# Altium PCB EST_MainV20.PcbDoc (part 3 of 8)
Units mm, origin at the board's own origin, x right, y up, seen from the top; angles counter-clockwise.
Board outline 69.72 x 115.32 mm, 2 copper layers (Top Layer, Bottom Layer); 330 components, 239 nets, 1066 pads, 416 vias.
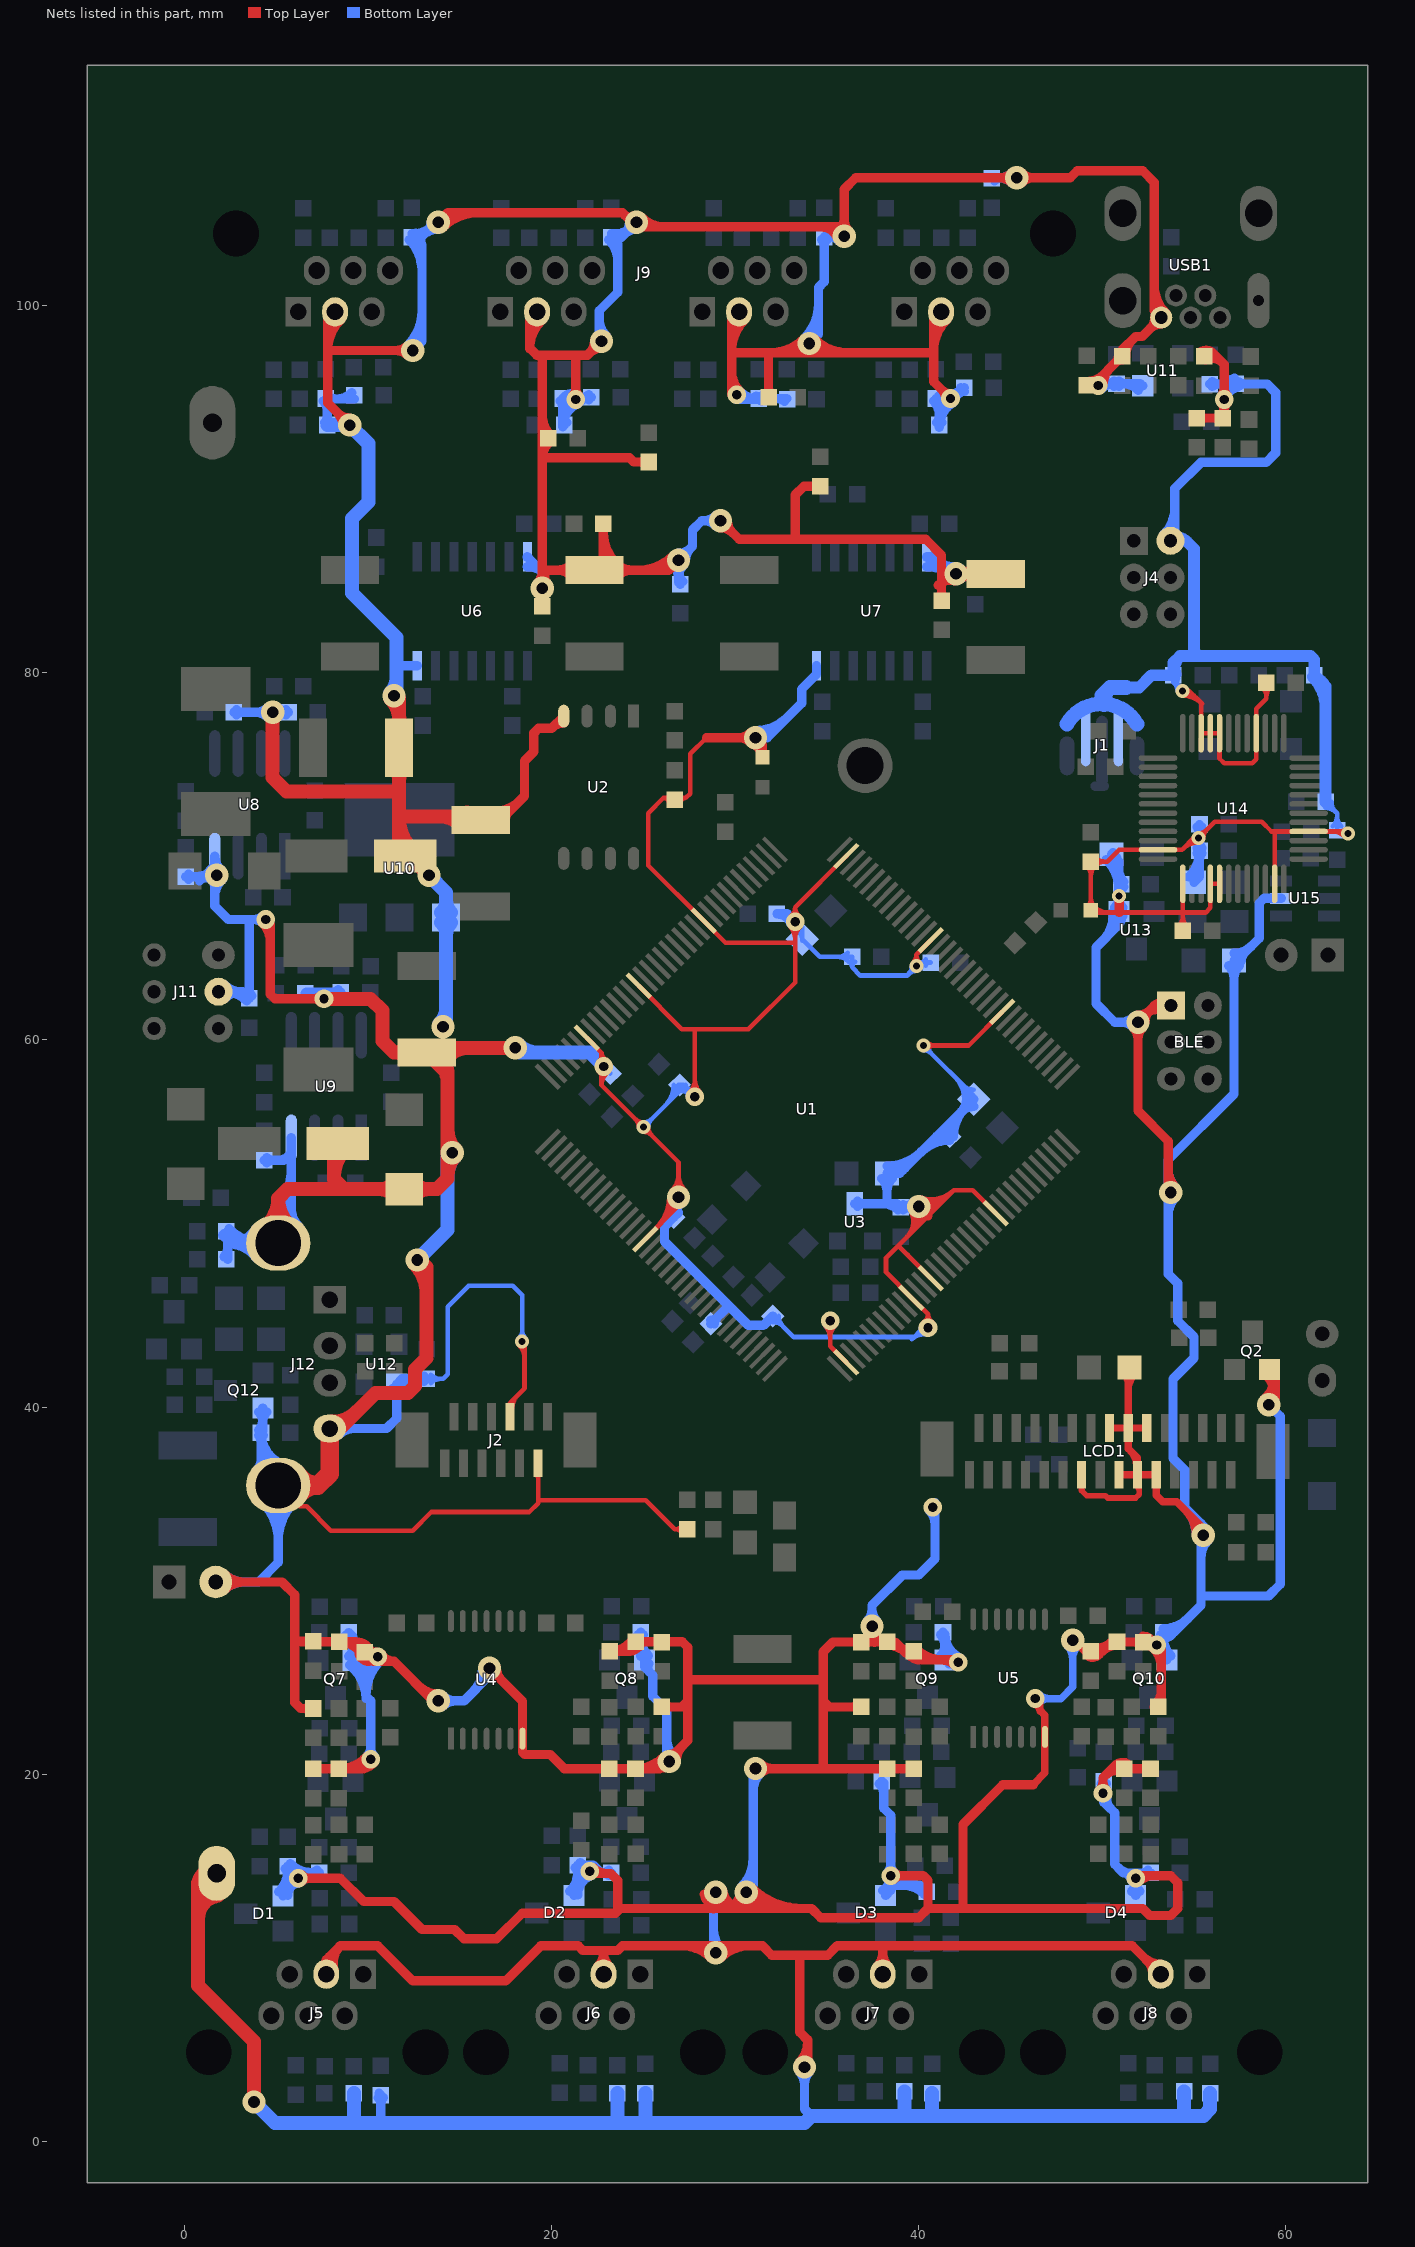
[diagram p3: the nets of this part, all layers, seen from the top]

## Via types
v1: diameter 0.762, hole 0.381, Top Layer to Bottom Layer, 258 vias
v2: diameter 1.27, hole 0.635, Top Layer to Bottom Layer, 91 vias
v3: diameter 1.016, hole 0.508, Top Layer to Bottom Layer, 66 vias
v4: diameter 1.524, hole 0.635, Top Layer to Bottom Layer, 1 vias

## Nets (pads, with @x,y where several pads share a name; then routed paths per layer and width w, separated by ;. In a path a pad name is that pad's centre, name@x,y a point inside that pad or via, vN(x,y) a via of type N, cw(c..) or ccw(c..) an arc to the next point about the centre after c; other vN are vias at no path point) (continued)
GND: BLE.1 C5.1 C6.1 C7.1 C8.1 C9.2 C10.1 C11.1 C12.1 C15.2 C16.2 C17.2 C18.2 C19.2 C20.2 C21.2 C22.2 C23.2 C24.2 C25.2 C26.2 C27.2 C28.2 C29.2 C30.2 C31.1 C32.1 C33.1 C34.1 C35.1 C36.1 C37.1 C38.1 C39.2 C40.1 C41.1 C42.1 C43.1 C44.1 C45.1 C46.1 C47.2 C48.1 C49.1 C50.1 C51.1 C52.1 C53.1 C54.1 C57.2 C58.2 C61.1 C62.1 C63.2 C64.1 C65.2 C66.1 C67.1 C68.2 C69.1 C70.2 C71.1 C72.1 C73.2 C74.1 C75.1 C76.1 C77.1 C78.1 C79.1 C80.1 C81.1 C83.2 C84.2 C85.2 D1.1 D2.1 D3.1 D4.1 D6.1 D12.2 D13.2 E1.2 E2.2 E3.2 E4.2 E5.2 E6.2 E7.2 J1.2 J2.2 J2.5 J4.2 J5.3 J6.3 J7.3 J8.3 J9.3 J9.9 J9.15 J9.21 J10.2 J11.2 J12.4 J12.5 J12.6 LCD1.10 LCD1.11 LCD1.12 LCD1.13 LCD1.14 LCD1.15 LCD1.18 pad.1 Q2.1 Q7.1 Q8.1 Q9.1 Q10.1 Q12.1 R9.1 R10.1 R11.1 R41.1 R42.1 R43.1 R44.1 R45.1 R46.1 R47.1 R48.1 R57.2 R58.2 R59.2 R60.2 R85.2 R87.2 R89.2 R91.2 R93.2 R94.2 R95.2 R96.2 R102.1 R104.1 R120.1 R122.1 R139.1 R140.1 R141.2 R142.2 R143.2 R149.1 R151.1 R158.1 R159.1 R160.1 R167.2 R171.1 R172.1 R173.1 R174.1 U1.16 U1.38 U1.48 U1.51 U1.61 U1.83 U1.94 U1.107 U1.120 U1.130 U1.138 U2.4 U3.2 U4.7 U5.7 U6.7 U6.14 U7.7 U7.14 U8.4 U9.4 U10.1 U11.1 U12.1 U13.2 U14.4 U14.16 U14.20 U14.21 U14.22 U14.35 U14.37 U14.40 U14.41 U14.47 U15.2 USB1.5 | length 1769.5
  Top Layer w0.254: J12.6@5.13,35.735 6.272,34.593 6.682,34.593 8.001,33.274 12.446,33.274 13.462,34.29 18.796,34.29 19.279,34.773 19.279,34.925 ; J2.5@17.676,40.066 ccw(c17.537,40.234) 17.755,40.234 ; J2.5@17.755,39.472 17.755,40.234 ; J2.5@17.833,40.066 cw(c17.972,40.234) 17.755,40.234 ; J2.5@17.878,39.972 cw(c18.807,39.972) 18.15,40.629 ; v1@18.235,43.381 cw(c17.495,42.641) 18.542,42.641 ; v1(18.415,43.561) 18.542,43.434 18.542,41.021 17.755,40.234 ; J2.2@19.192,36.345 cw(c18.982,36.135) 19.279,36.135 cw(c19.576,36.135) J2.2@19.366,36.345 ; J2.2@19.279,36.424 19.279,34.925 ; U1.138@21.927,60.109 22.733,59.302 ; v3@22.591,58.278 cw(c22.247,57.934) 22.733,57.934 ; v3@22.591,58.816 ccw(c22.247,59.16) 22.733,59.16 ; 22.733,57.523 cw(c23.638,57.523) v3@23.09,58.244 ; 22.733,58.035 cw(c23.249,58.035) v3@22.937,58.446 ; v3@23.004,58.9 cw(c23.167,59.302) 22.733,59.302 ; U1.130@24.755,62.937 27.113,60.579 27.813,60.579 ; v1@24.765,55.245 ccw(c24.152,55.245) 24.585,55.679 ccw(c25.019,56.112) v1@25.019,55.499 ; v1@25.019,54.991 cw(c25.019,54.378) 25.453,54.811 cw(c25.886,55.245) v1@25.273,55.245 ; U1.16@25.109,49.148 26.924,50.964 v2(26.924,51.435) ; U1.16@25.724,49.764 ccw(c24.052,51.435) v2@26.416,51.435 ; 26.157,50.197 ccw(c24.919,51.435) v2@26.67,51.435 ; 26.182,73.174 ccw(c26.182,73.607) C11.1@26.488,73.301 ; C11.1@26.414,72.961 ccw(c26.107,72.848) 26.107,73.174 ; v2@26.565,51.794 ccw(c25.698,52.661) 26.924,52.661 ccw(c28.15,52.661) v2@27.283,51.794 ; 26.591,50.631 ccw(c25.787,51.435) v2(26.924,51.435) ; C11.1@26.945,73.301 ccw(c27.251,73.607) 27.251,73.174 ; C11.1@27.02,72.96 cw(c27.327,72.846) 27.327,73.174 ; R10.1@27.158,33.144 ccw(c26.721,32.783) 26.721,33.35 ; R10.1@27.158,33.556 cw(c26.721,33.918) 26.721,33.35 ; R10.1@27.407,33.35 26.721,33.35 ; v3@27.544,57.165 ccw(c26.893,57.816) 27.813,57.816 ccw(c28.733,57.816) v3@28.082,57.165 ; v3(27.813,56.896) 27.813,60.579 ; 28.448,76.454 27.559,75.565 27.559,73.406 27.327,73.174 ; v3@33.005,66.152 cw(c32.354,65.501) 33.274,65.501 cw(c34.194,65.501) v3@33.543,66.152 ; v3@33.036,66.719 ccw(c32.641,67.213) 33.274,67.213 ; v3@33.512,66.719 cw(c33.907,67.213) 33.274,67.213 ; v3@34.91,44.435 cw(c34.259,43.784) 35.179,43.784 cw(c36.099,43.784) v3@35.448,44.435 ; 35.179,43.815 35.179,43.321 ; v3(35.179,44.704) 35.179,43.321 ; U1.38@36.069,42.431 35.179,43.321 ; U1.107@36.069,70.008 33.274,67.213 ; 39.369,49.275 ccw(c38.54,50.104) v2@39.562,50.678 ; 39.37,48.322 39.528,48.164 ; 39.606,49.512 ccw(c38.843,50.274) v2@39.784,50.803 ; v1@39.698,64.188 ccw(c39.265,64.621) 39.878,64.621 ccw(c40.491,64.621) v1@40.058,64.188 ; 39.761,50.205 ccw(c39.98,50.853) 40.463,50.369 ; 39.843,49.749 ccw(c39.147,50.445) v2(40.005,50.927) ccw(c40.418,52.15) 41.331,51.237 ; v2@39.842,50.446 ccw(c40.126,51.285) 40.753,50.659 ; v1(39.878,64.008) 39.878,64.625 U1.94@40.665,65.412 ; v2@39.924,50.686 ccw(c40.272,51.718) 41.042,50.948 ; 40.08,49.986 ccw(c39.45,50.615) v2@40.226,51.051 ; v2@40.086,51.168 ccw(c40.564,52.583) 41.621,51.527 ; v2@40.168,51.408 ccw(c40.71,53.015) 41.91,51.816 ; v1(40.259,59.69) 42.721,59.69 U1.83@44.554,61.523 ; v3@40.294,44.634 ccw(c39.995,45.058) 40.513,45.058 ; 40.317,50.223 ccw(c39.754,50.786) v2@40.448,51.176 ; v1@40.439,59.51 cw(c40.872,59.077) 40.872,59.69 cw(c40.872,60.303) v1@40.439,59.87 ; v3@40.513,44.577 40.513,45.058 ; 40.554,50.46 ccw(c40.057,50.956) 40.669,51.3 ; U1.51@40.665,47.027 39.528,48.164 ; v3@40.732,44.634 cw(c41.031,45.058) 40.513,45.058 ; 42.291,51.816 42.947,51.816 ; U1.61@44.2,50.563 42.947,51.816 ; R167.2@49.149,69.469 cw(c48.597,68.918) 49.377,68.918 cw(c50.157,68.918) 49.606,69.469 cw(c50.157,68.918) 50.157,69.698 cw(c50.157,70.478) R167.2@49.606,69.926 ; D13.2@49.192,67.242 ccw(c48.747,67.688) 49.377,67.688 ; D13.2@49.377,67.057 R167.2@49.377,69.698 50.267,69.698 50.912,70.343 U14.35@53.033,70.343 54.341,70.343 54.991,70.993 v1(55.245,70.993) ; 49.377,67.707 ccw(c50.034,67.707) 49.57,67.242 ccw(c50.326,67.998) 50.326,66.929 ; D13.2@49.381,67.054 49.506,66.929 54.383,66.929 ; C81.1@54.15,66.171 ccw(c53.588,66.733) 54.383,66.733 ; v1@54.356,78.74 cw(c54.356,77.207) 55.44,78.291 ; 54.378,70.38 cw(c55.245,69.513) v1@55.245,70.739 ; C81.1@54.378,65.942 54.383,65.947 54.383,66.929 ; 54.383,66.712 ccw(c55.148,66.712) C81.1@54.607,66.171 ; U14.37@54.383,68.493 54.383,66.929 ; 54.811,70.813 cw(c55.245,70.38) v1(55.245,70.993) ; 55.006,78.725 ccw(c54.356,78.074) v1(54.356,78.994) 54.737,78.994 55.383,78.348 U14.22@55.383,76.693 U14.21@55.883,76.693 U14.20@56.383,76.693 56.383,75.316 56.642,75.057 58.166,75.057 58.383,75.274 U14.16@58.383,76.693 58.383,78.023 58.931,78.571 C70.2@58.931,79.447 ; v1@55.245,71.247 ccw(c55.245,71.86) 55.679,71.427 ccw(c56.112,70.993) v1@55.499,70.993 ; U14.41@56.383,68.493 U14.40@55.883,68.493 55.883,67.186 55.626,66.929 54.383,66.929 ; C70.2@58.703,79.219 cw(c58.151,78.667) 58.931,78.667 cw(c59.711,78.667) C70.2@59.16,79.219 ; U14.47@59.383,68.493 59.383,70.739 ; 59.383,70.94 59.383,70.739 ; 62.527,71.343 cw(c62.527,70.401) v1@63.193,71.067 ; 62.993,71.343 ccw(c62.993,71.627) v1@63.193,71.427 ; v1(63.373,71.247) 63.277,71.343 U14.4@61.233,71.343 59.33,71.343 ; 19.279,34.925 25.146,34.925 26.721,33.35 ; 22.733,59.302 22.733,57.531 v1(25.019,55.245) 26.924,53.34 v2(26.924,51.435) ; 26.107,73.174 27.327,73.174 ; 26.107,73.174 25.273,72.34 25.273,69.49 U1.120@28.29,66.472 29.485,65.278 33.274,65.278 ; 27.813,60.579 30.734,60.579 33.274,63.119 33.274,65.278 ; 33.274,65.278 v3(33.274,66.421) 33.274,67.213 ; 38.861,48.767 38.925,48.767 39.528,48.164 ; 38.861,48.767 40.513,50.419 41.91,51.816 ; 38.861,48.767 38.227,48.133 38.227,47.344 U1.48@39.604,45.966 40.513,45.058 ; 41.91,51.816 42.947,51.816 ; v1(55.245,70.993) 56.134,71.882 58.674,71.882 59.213,71.343 59.33,71.343 ; 59.33,71.343 59.383,71.29 59.383,70.739
  Top Layer w0.305: LCD1.18@48.87,36.322 48.87,35.458 49.149,35.179 50.165,35.179 50.292,35.052 51.816,35.052 52.019,35.255 LCD1.12@52.019,36.322 ; LCD1.18@48.946,35.761 ccw(c49.179,35.573) 48.967,35.361 ; LCD1.12@51.849,35.753 cw(c51.437,35.341) 52.019,35.341
  Top Layer w0.406: 46.232,19.435 46.877,20.08 U5.7@46.877,22.047 46.877,23.227 46.609,23.495 v3@46.609,24.13 ; v3@46.294,23.831 cw(c46.216,23.446) 46.609,23.446 ; v3@46.617,23.974 ccw(c47.009,23.74) 46.686,23.418 ; v2(48.387,27.305) 48.444,27.305 C31.1@49.05,26.698 ; v2@48.609,27.139 ccw(c49.146,27.676) C31.1@49.324,26.938 ; LCD1.15@50.394,38.862 LCD1.13@51.41,38.862 ; LCD1.14@50.902,36.322 LCD1.12@51.918,36.322 ; C5.1@51.168,41.85 cw(c50.586,41.268) 51.41,41.268 ; 51.41,40.906 cw(c52.744,40.906) C5.1@51.8,41.85 ; LCD1.13@51.484,38.937 LCD1.13@51.41,38.862 ; C5.1@51.484,42.166 51.41,42.091 LCD1.13@51.41,38.862 ; 51.545,37.609 cw(c50.757,36.822) LCD1.12@51.871,36.822 ; LCD1.11@52.426,38.862 LCD1.13@51.41,38.862 ; 54.492,34.408 cw(c53.105,33.02) v2@55.067,33.02 ; 55.186,33.714 cw(c54.492,33.02) v2@55.474,33.02 ; v2(55.499,33.02) 55.499,33.401 54.051,34.849 53.289,34.849 52.934,35.204 LCD1.10@52.934,36.322 LCD1.12@51.918,36.322 ; C31.1@49.05,26.698 C31.1@49.382,26.698 C31.1@49.05,26.698 ; LCD1.13@51.41,38.862 51.41,37.744 51.918,37.236 LCD1.12@51.918,36.322
  Top Layer w0.508: J10.2@1.727,30.48 5.334,30.48 6.025,29.789 6.025,27.178 ; J10.2@2.176,30.031 cw(c3.26,28.947) 3.26,30.48 cw(c3.26,32.013) J10.2@2.176,30.929 ; v3@4.265,66.368 cw(c3.219,65.322) 4.699,65.322 ; v3(4.445,66.548) 4.699,66.294 4.699,62.484 4.953,62.23 v3(7.62,62.23) ; v3(6.223,14.351) 8.509,14.351 9.779,13.081 11.43,13.081 12.954,11.557 14.732,11.557 15.24,11.049 17.018,11.049 18.415,12.446 23.495,12.446 23.749,12.7 ; 6.397,27.225 C36.1@8.442,27.225 ; v3@6.403,14.171 cw(c6.836,13.738) 6.836,14.351 cw(c6.836,14.964) v3@6.403,14.531 ; 6.515,27.225 ccw(c6.515,27.774) 6.903,27.385 cw(c6.568,27.72) 6.568,27.247 cw(c6.568,26.774) R94.2@6.903,27.108 ; R87.2@6.903,23.451 ccw(c6.568,23.116) 6.568,23.589 ccw(c6.568,24.062) R87.2@6.903,23.728 ; C24.2@7.037,20.31 C23.2@8.434,20.31 ; R87.2@7.041,23.589 6.355,23.589 6.025,23.92 6.025,27.178 ; R94.2@7.041,27.247 6.094,27.247 6.025,27.178 ; C24.2@7.175,20.171 cw(c7.51,19.837) 7.51,20.31 cw(c7.51,20.783) C24.2@7.175,20.448 ; R94.2@7.18,27.385 ccw(c7.568,27.774) 7.568,27.225 ; v3@7.44,62.05 ccw(c7.007,61.617) 7.007,62.23 ccw(c7.007,62.843) v3@7.44,62.41 ; J5.3@7.687,9.206 cw(c8.517,9.451) 7.905,10.064 ; J5.3@7.746,9.124 7.746,9.905 8.509,10.668 ; 7.819,97.496 cw(c10.25,97.496) J9.3@8.536,99.219 ; 7.819,98.718 cw(c9.034,98.718) J9.3@8.177,99.58 ; J9.3@7.819,99.136 7.819,97.536 ; J5.3@8.174,9.35 cw(c9.45,9.727) 8.509,10.668 ; C23.2@8.295,20.171 ccw(c7.96,19.837) 7.96,20.31 ccw(c7.96,20.783) C23.2@8.295,20.448 ; C36.1@8.303,27.086 ccw(c7.969,26.752) 7.969,27.225 ccw(c7.969,27.698) C36.1@8.303,27.363 ; C23.2@8.572,20.171 cw(c8.907,19.837) 8.907,20.31 cw(c8.907,20.783) C23.2@8.572,20.448 ; C36.1@8.581,27.086 cw(c8.915,26.752) 8.915,27.225 cw(c8.915,27.698) C36.1@8.581,27.363 ; v2@8.636,93.472 ccw(c7.716,93.472) 8.367,94.122 ccw(c9.017,94.773) v2@9.017,93.853 ; v2(9.017,93.472) 7.819,94.67 7.819,97.536 ; 9.351,27.225 cw(c9.351,26.341) C32.1@10.104,26.804 ; C32.1@9.493,26.986 ccw(c10.304,27.796) v3@10.498,26.666 ; C32.1@9.545,26.536 ccw(c10.075,26.725) 10.075,26.162 ; 9.569,20.31 ccw(c9.569,21.356) v3@10.349,20.659 ; C32.1@9.643,26.64 ccw(c9.169,26.64) 9.504,26.975 ccw(c9.839,27.31) C32.1@9.839,26.836 ; C32.1@9.672,26.538 ccw(c8.442,25.781) C36.1@8.442,27.225 ; C32.1@9.839,26.444 cw(c9.839,25.971) 10.173,26.306 cw(c10.508,26.64) C32.1@10.035,26.64 ; v3@9.971,20.997 cw(c8.434,22.371) C23.2@8.434,20.31 ; C32.1@10.023,26.706 ccw(c10.795,26.981) v3@10.795,26.162 ; v3(10.16,20.828) 10.287,20.828 9.769,20.31 C23.2@8.434,20.31 ; v3@10.76,26.545 ccw(c11.43,26.94) 11.43,26.162 ; v2@12.177,97.267 ccw(c11.526,96.616) 11.526,97.536 ccw(c11.526,98.456) v2@12.177,97.805 ; v2(12.446,97.536) 7.819,97.536 ; 12.759,24.833 ccw(c13.843,25.917) v2@13.843,24.384 ; 12.827,8.763 13.589,8.763 ; v2(13.843,24.003) 13.589,24.003 11.43,26.162 ; v2(13.843,104.521) 14.351,105.029 16.51,105.029 ; 14.478,105.029 16.51,105.029 ; E7.2@15.646,72.161 17.424,72.161 18.542,73.279 18.542,75.184 19.05,75.692 19.05,76.708 19.304,76.962 20.015,76.962 U2.4@20.676,77.622 ; v2@16.637,25.4 cw(c16.637,24.48) 17.287,25.131 cw(c17.938,25.781) v2@17.018,25.781 ; v2(16.637,25.781) 18.429,23.989 U4.7@18.429,21.946 18.429,21.209 18.556,21.082 19.939,21.082 20.704,20.317 C26.2@23.161,20.317 C25.2@24.583,20.317 ; E7.2@16.98,72.466 ccw(c16.98,74.275) 18.259,72.996 ; E7.2@17.488,71.958 cw(c18.132,71.958) E7.2@17.676,72.413 ; 18.819,97.62 cw(c20.96,97.62) J9.9@19.521,99.205 ; 18.819,98.768 cw(c19.918,98.768) J9.9@19.179,99.582 ; J9.9@18.819,99.136 18.819,97.663 19.2,97.282 21.971,97.282 v2@22.606,97.917 ; v2@19.234,84.851 ccw(c18.583,85.502) 19.503,85.502 ccw(c20.423,85.502) v2@19.773,84.851 ; C39.2@19.365,83.752 ccw(c19.03,84.087) 19.503,84.087 ccw(c19.976,84.087) C39.2@19.642,83.752 ; C39.2@19.503,84.02 v2(19.503,84.582) 19.503,85.289 ; 19.503,91.643 cw(c20.75,91.643) R172.1@19.961,92.609 ; 19.503,94.04 ccw(c21.117,94.04) R172.1@19.976,92.899 ; 19.503,97.227 19.503,91.694 ; v2@19.779,84.845 cw(c20.154,85.205) 19.787,85.573 ; 20.042,76.989 cw(c20.676,76.356) U2.4@20.676,77.251 ; v3@21.156,95.049 ccw(c20.723,95.482) 21.336,95.482 ccw(c21.949,95.482) v3@21.516,95.049 ; E1.2@21.167,85.213 ccw(c20.3,84.346) 20.3,85.573 ccw(c20.3,86.799) E1.2@21.167,85.932 ; v3(21.336,94.869) 21.336,97.155 ; v3@22.225,14.605 23.241,14.605 23.622,14.224 23.622,12.7 23.749,12.7 ; v3@22.278,14.912 ccw(c23.018,15.652) 23.018,14.605 ; v2@22.352,98.044 cw(c21.432,98.044) 22.083,97.394 cw(c22.733,96.743) v2@22.733,97.663 ; J6.3@22.531,9.539 ccw(c21.769,10.3) 22.846,10.3 ccw(c23.923,10.3) J6.3@23.161,9.539 ; R171.1@22.696,87.949 cw(c22.361,87.614) 22.835,87.614 cw(c23.308,87.614) R171.1@22.973,87.949 ; E1.2@22.835,86.055 R171.1@22.835,88.088 ; 22.835,86.4 ccw(c24.005,86.4) E1.2@23.178,85.573 ; 22.835,87.627 ccw(c25.232,87.627) 23.537,85.932 ccw(c24.404,86.799) 24.404,85.573 ccw(c24.404,84.346) E1.2@23.537,85.213 ; J6.3@22.846,9.124 22.846,10.414 ; C26.2@23.022,20.178 ccw(c22.688,19.844) 22.688,20.317 ccw(c22.688,20.79) C26.2@23.022,20.455 ; C26.2@23.299,20.178 cw(c23.634,19.844) 23.634,20.317 cw(c23.634,20.79) C26.2@23.299,20.455 ; C33.1@23.307,26.56 cw(c23.642,26.225) 23.642,26.698 cw(c23.642,27.172) C33.1@23.307,26.837 ; 23.368,105.029 22.606,105.029 ; 24.003,104.902 ccw(c24.257,105.156) v2@24.442,104.848 ; 24.161,26.698 ccw(c24.161,27.536) R95.2@24.841,27.046 ; R95.2@24.392,27.229 cw(c23.918,27.229) 24.253,26.894 cw(c24.588,26.559) R95.2@24.588,27.033 ; R95.2@24.429,27.343 cw(c23.169,28.251) C33.1@23.169,26.698 24.057,26.698 R95.2@24.588,27.229 27.127,27.229 27.432,26.924 27.432,25.146 ; C25.2@24.445,20.178 ccw(c24.11,19.844) 24.11,20.317 ccw(c24.11,20.79) C25.2@24.445,20.455 ; v2@24.511,104.267 v2@24.638,104.267 ; 24.716,85.573 ccw(c24.716,88.314) v2@26.655,86.375 ; C25.2@24.722,20.178 cw(c25.056,19.844) 25.056,20.317 cw(c25.056,20.79) C25.2@24.722,20.455 ; R95.2@24.726,27.09 cw(c25.061,26.755) 25.061,27.229 cw(c25.061,27.702) R95.2@24.726,27.367 ; v2@24.907,104.79 ccw(c26.171,106.054) 26.171,104.267 ; C49.1@25.156,91.324 ccw(c24.821,90.989) 24.821,91.462 ccw(c24.821,91.936) C49.1@25.156,91.601 ; C49.1@25.294,91.462 24.489,91.462 24.257,91.694 19.503,91.694 ; 25.487,27.229 cw(c25.487,26.68) C37.1@25.875,27.068 ; 25.8,20.317 ccw(c25.8,21.31) v2@26.506,20.612 ; 25.943,85.573 ccw(c25.943,87.087) v2@27.014,86.016 ; R89.2@26.01,23.673 27.102,23.673 27.432,24.003 ; v2@26.145,20.969 cw(c24.583,22.513) C25.2@24.583,20.317 ; R89.2@26.149,23.534 cw(c26.483,23.199) 26.483,23.673 cw(c26.483,24.146) R89.2@26.149,23.811 ; C37.1@26.152,27.068 cw(c26.54,26.68) 26.54,27.229 ; v2@26.416,21.082 ccw(c26.416,21.695) 26.85,21.262 ; v2@26.797,20.701 cw(c28.023,20.701) 27.156,21.568 ; v2(26.924,86.106) 26.391,85.573 E1.2@22.352,85.573 19.787,85.573 ; 27.116,10.668 cw(c27.116,8.447) v2@28.687,10.018 ; 28.331,13.475 ccw(c29.261,13.645) 29.261,12.7 ; 28.343,10.668 cw(c28.343,9.674) v2@29.046,10.377 ; 28.448,76.454 v2(31.115,76.454) 31.498,76.071 D12.2@31.498,75.391 ; 28.829,12.691 cw(c29.496,12.691) v2@29.152,13.262 ; v2@28.829,13.589 28.829,12.7 ; v2@28.831,13.566 ccw(c29.87,13.757) 29.87,12.7 ; v2@28.866,10.377 cw(c29.569,9.674) 29.569,10.668 ; v2@29.21,87.884 cw(c29.21,86.964) 29.86,87.615 cw(c30.511,88.265) v2@29.591,88.265 ; v2(29.21,88.265) 30.226,87.249 33.274,87.249 ; v2@29.225,10.018 cw(c30.796,8.447) 30.796,10.668 ; v2@29.331,13.658 ccw(c30.48,13.868) 30.48,12.7 ; 29.819,96.412 ccw(c31.388,96.412) v3@30.279,95.303 ; 29.819,97.488 cw(c32.268,97.488) J9.15@30.536,99.22 ; 29.819,98.715 cw(c31.042,98.715) J9.15@30.177,99.58 ; J9.15@29.819,99.136 29.819,97.409 ; v3@29.972,94.996 29.819,95.149 29.819,97.409 ; 30.158,13.14 ccw(c31.22,14.202) 31.22,12.7 ; v2@30.378,13.284 cw(c30.036,12.827) 30.607,12.827 ; v2@30.517,13.499 ccw(c32.447,15.429) 32.447,12.7 ; v2(30.607,13.589) 30.607,12.827 ; v2@30.836,13.284 ccw(c31.178,12.827) 30.607,12.827 ; v2@30.846,76.185 ccw(c30.195,75.534) 30.195,76.454 ccw(c30.195,77.374) v2@30.846,76.723 ; v2@30.876,13.858 ccw(c33.673,16.655) 33.673,12.7 ; v2@30.973,76.1 cw(c30.662,75.324) D12.2@31.498,75.324 ; v2(31.115,20.32) 31.118,20.317 34.798,20.317 ; v2@31.384,20.051 cw(c32.027,19.408) 32.027,20.317 ; v2@31.384,20.589 ccw(c32.042,21.247) 32.042,20.317 ; R173.1@31.688,95.134 ccw(c31.353,95.469) 31.826,95.469 ccw(c32.299,95.469) R173.1@31.965,95.134 ; R173.1@31.826,94.996 31.826,96.393 ; 31.826,95.707 31.826,96.393 ; 31.826,97.358 31.826,96.393 ; 31.89,97.409 ccw(c31.89,100.063) v2@33.767,98.186 ; 33.116,97.409 ccw(c33.116,98.837) v2@34.126,97.827 ; v2@33.513,4.333 ccw(c32.449,5.397) 33.953,5.397 ; v2@33.946,97.827 ccw(c34.956,98.837) 34.956,97.409 ; v2@33.953,4.064 33.953,5.544 33.528,5.969 33.528,10.16 ; v2(34.036,97.917) 33.528,97.409 ; v2@34.305,98.186 ccw(c36.182,100.063) 36.182,97.409 ; R174.1@34.507,90.006 ccw(c34.173,89.671) 34.173,90.145 ccw(c34.173,90.618) R174.1@34.507,90.283 ; R174.1@34.646,90.145 33.757,90.145 33.274,89.662 33.274,87.249 ; 35.306,104.267 34.671,104.267 ; v2@35.672,104.028 ccw(c35.021,104.679) 35.941,104.679 ccw(c36.861,104.679) v2@36.21,104.028 ; v2(35.941,103.759) 35.941,104.394 ; R91.2@36.743,23.534 ccw(c36.408,23.199) 36.408,23.673 ccw(c36.408,24.146) R91.2@36.743,23.811 ; C38.1@36.746,27.068 ccw(c36.412,26.733) 36.412,27.206 ccw(c36.412,27.68) C38.1@36.746,27.345 ; R91.2@36.881,23.673 35.128,23.673 34.798,24.003 ; C38.1@37.023,27.068 cw(c37.358,26.733) 37.358,27.206 cw(c37.358,27.68) C38.1@37.023,27.345 ; v2@37.278,27.735 cw(c36.974,27.197) 37.592,27.197 ; v2@37.592,28.194 37.592,27.206 ; J7.3@37.731,9.539 ccw(c36.969,10.3) 38.046,10.3 ccw(c39.123,10.3) J7.3@38.361,9.539 ; 37.777,27.206 ccw(c37.777,27.755) R96.2@38.165,27.367 ; J7.3@38.046,9.124 38.046,10.595 ; C28.2@38.161,20.178 ccw(c37.826,19.844) 37.826,20.317 ccw(c37.826,20.79) C28.2@38.161,20.455 ; R96.2@38.304,27.033 cw(c38.304,25.64) C34.1@39.288,26.625 ; C28.2@38.438,20.178 cw(c38.772,19.844) 38.772,20.317 cw(c38.772,20.79) C28.2@38.438,20.455 ; v3@38.661,14.298 cw(c39.094,13.865) 39.094,14.478 cw(c39.094,15.091) v3@38.661,14.658 ; v3@38.735,14.478 40.259,14.478 40.513,14.224 40.513,12.7 ; 38.964,26.949 ccw(c39.349,27.334) C34.1@39.629,26.867 ; C34.1@39.509,26.478 ccw(c40.087,27.056) 40.087,26.238 ; C27.2@39.583,20.178 ccw(c39.248,19.844) 39.248,20.317 ccw(c39.248,20.79) C27.2@39.583,20.455 ; C34.1@39.591,26.56 ccw(c39.256,26.225) 39.256,26.698 ccw(c39.256,27.172) C34.1@39.591,26.837 ; C27.2@39.722,20.317 C28.2@38.299,20.317 34.798,20.317 ; C34.1@39.73,26.502 cw(c39.73,26.029) 40.064,26.364 cw(c40.399,26.698) C34.1@39.926,26.698 ; C34.1@39.868,26.837 ccw(c41.314,28.283) 41.314,26.238 ; v2(40.005,50.927) 40.513,50.419 ; 40.819,97.496 cw(c43.25,97.496) J9.21@41.536,99.219 ; 40.819,98.718 cw(c42.034,98.718) J9.21@41.177,99.58 ; 41.068,84.756 cw(c41.722,84.101) v2@41.945,85 ; C47.2@41.107,84.057 ccw(c40.772,84.392) 41.246,84.392 ccw(c41.719,84.392) C47.2@41.384,84.057 ; J9.21@41.221,99.636 40.819,99.234 40.819,97.536 ; 41.244,26.238 cw(c41.244,25.191) v3@41.984,25.932 ; C47.2@41.246,83.918 41.246,84.934 ; v3@41.478,94.92 ccw(c40.865,94.92) 41.299,95.353 ccw(c41.732,95.787) v3@41.732,95.174 ; v3(41.732,94.92) 40.819,95.833 40.819,97.536 ; v3@42.291,26.238 40.19,26.238 39.885,26.543 C34.1@39.73,26.698 39.215,26.698 38.707,27.206 37.592,27.206 ; v2@42.306,85.1 cw(c42.957,84.45) 42.957,85.369 cw(c42.957,86.289) v2@42.306,85.639 ; E2.2@43.011,85.01 ccw(c42.144,84.143) 42.144,85.369 ccw(c42.144,86.596) E2.2@43.011,85.729 ; E2.2@44.196,85.369 v2(42.037,85.369) 41.681,85.369 41.246,84.934 ; v2@45.07,106.665 ccw(c44.419,106.014) 44.419,106.934 ccw(c44.419,107.854) v2@45.07,107.203 ; v2@45.608,106.665 cw(c46.259,106.014) 46.259,106.934 cw(c46.259,107.854) v2@45.608,107.203 ; 46.232,19.435 44.581,19.435 42.418,17.272 42.418,12.7 ; C67.1@49.145,95.843 ccw(c49.145,97.158) 50.075,96.228 ; C67.1@49.208,95.647 ccw(c49.208,96.207) v3@49.604,95.811 ; C31.1@49.316,26.393 ccw(c49.437,26.952) 49.841,26.548 ; C31.1@49.382,26.698 49.991,26.698 R93.2@50.499,27.206 ; C31.1@49.423,26.89 ccw(c49.671,28.034) R93.2@50.499,27.206 ; C31.1@49.52,26.56 cw(c49.855,26.225) 49.855,26.698 cw(c49.855,27.172) C31.1@49.52,26.837 ; v3@49.602,95.454 ccw(c49.145,95.009) C67.1@49.145,95.647 49.494,95.647 C65.2@51.075,97.228 51.075,97.557 51.816,98.298 52.181,98.298 USB1.5@53.21,99.327 52.832,99.705 52.832,106.68 52.197,107.315 48.641,107.315 48.26,106.934 v2(45.339,106.934) 36.576,106.934 35.941,106.299 35.941,104.394 ; v3@49.858,19.153 ccw(c49.425,19.587) 50.038,19.587 ccw(c50.651,19.587) v3@50.218,19.153 ; 49.99,26.697 cw(c50.8,25.886) R93.2@50.8,27.033 ; v3@50.038,18.846 50.038,19.812 50.543,20.317 C29.2@51.202,20.317 C30.2@52.625,20.317 ; v3@50.038,95.631 cw(c51.389,95.631) 50.434,96.586 ; 50.213,19.987 cw(c50.773,19.427) C29.2@51.117,20.14 ; 50.609,20.383 cw(c51.202,19.79) C29.2@51.202,20.629 ; 50.719,20.493 cw(c51.102,20.109) C29.2@51.338,20.598 ; C65.2@50.879,97.228 cw(c50.406,97.228) 50.741,96.893 cw(c51.075,96.559) C65.2@51.075,97.032 ; v1(50.902,67.818) 50.927,67.793 50.927,66.929 ; R93.2@50.939,27.367 ccw(c51.327,27.755) 51.327,27.206 ; C29.2@51.064,20.178 ccw(c50.729,19.844) 50.729,20.317 ccw(c50.729,20.79) C29.2@51.064,20.455 ; C65.2@51.271,97.228 cw(c52.54,97.228) 51.643,98.125 ; C29.2@51.341,20.178 cw(c51.676,19.844) 51.676,20.317 cw(c51.676,20.79) C29.2@51.341,20.455 ; v2@51.674,60.691 cw(c51.023,60.04) 51.943,60.04 cw(c52.863,60.04) v2@52.212,60.691 ; v2@51.943,61.341 ccw(c51.943,62.261) 52.593,61.61 ccw(c53.244,60.96) v2@52.324,60.96 ; v3@51.946,14.478 53.721,14.478 54.102,14.097 54.102,12.7 53.721,12.319 52.578,12.319 52.197,12.7 42.418,12.7 ; C35.1@51.971,27.206 cw(c51.971,26.063) v3@52.779,26.871 ; v3@51.999,14.171 cw(c52.739,13.431) 52.739,14.478 ; C35.1@52.088,27.068 ccw(c51.753,26.733) 51.753,27.206 ccw(c51.753,27.68) C35.1@52.088,27.345 ; C35.1@52.216,27.518 cw(c52.236,26.902) C35.1@52.672,27.338 ; 52.244,10.056 ccw(c53.176,10.988) J8.3@53.176,9.67 ; v2@52.305,61.322 cw(c53.646,59.98) BLE.1@53.746,61.874 ; C35.1@52.318,27.033 cw(c52.627,26.453) v3@53.092,26.918 ; C35.1@52.365,27.068 cw(c52.7,26.733) 52.7,27.206 cw(c52.7,27.68) C35.1@52.365,27.345 ; 52.413,61.43 cw(c52.947,60.896) BLE.1@53.425,61.481 ; 52.485,9.814 cw(c51.895,9.224) J8.3@52.73,9.224 ; C30.2@52.486,20.178 ccw(c52.152,19.844) 52.152,20.317 ccw(c52.152,20.79) C30.2@52.486,20.455 ; 52.81,61.827 cw(c53.304,61.333) BLE.1@53.746,61.874 ; R85.2@52.832,23.673 R85.2@53.036,23.673 ; 52.832,99.848 ccw(c53.731,99.848) USB1.5@53.095,99.212 ; 52.832,101.075 ccw(c54.958,101.075) USB1.5@53.455,99.571 ; USB1.5@52.864,99.327 cw(c52.029,99.327) 52.619,98.736 cw(c53.21,98.145) USB1.5@53.21,98.981 ; R85.2@52.977,23.86 ccw(c52.877,24.18) 53.213,24.18 53.213,25.527 ; R85.2@53.036,23.876 R85.2@53.036,23.673 ; J8.3@53.176,9.124 51.632,10.668 35.56,10.668 35.052,10.16 33.528,10.16 ; v3@53.213,26.67 53.213,25.781 ; BLE.1@53.309,61.617 ccw(c52.857,61.351) 52.857,61.874 ; BLE.1@53.309,62.132 cw(c52.857,62.398) 52.857,61.874 ; v2@53.594,51.689 53.594,54.483 51.943,56.134 v2(51.943,60.96) 52.857,61.874 ; 53.594,52.915 ccw(c54.947,52.915) v2@53.99,51.958 ; C66.1@55.147,93.856 56.562,93.856 R151.1@56.565,93.853 56.642,93.93 v3(56.642,94.869) 56.642,96.774 56.207,97.209 C64.1@55.554,97.209 ; C66.1@55.286,93.717 cw(c55.621,93.383) 55.621,93.856 cw(c55.621,94.329) C66.1@55.286,93.995 ; C64.1@55.417,97.489 cw(c55.651,97.008) 56.029,97.387 ; C64.1@55.547,97.521 cw(c55.565,96.724) 56.129,97.287 ; C64.1@55.639,97.033 cw(c55.981,96.329) 56.534,96.882 ; C64.1@55.692,97.07 cw(c56.027,96.736) 56.027,97.209 cw(c56.027,97.682) C64.1@55.692,97.347 ; 56.085,93.856 cw(c56.085,93.373) R151.1@56.427,93.714 ; 56.099,93.856 ccw(c56.099,94.319) 56.427,93.992 ccw(c55.907,94.511) v3@56.642,94.511 ; v3@56.462,94.689 cw(c56.029,94.256) 56.642,94.256 cw(c57.255,94.256) v3@56.822,94.689 ; v3@56.462,95.049 ccw(c56.029,95.482) 56.642,95.482 ccw(c57.255,95.482) v3@56.822,95.049 ; v2@58.807,40.421 ccw(c57.685,41.732) Q2.1@59.411,41.732 ; Q2.1@58.881,41.812 cw(c57.603,40.535) v2@59.411,40.535 ; v2(59.055,40.132) 59.411,40.488 Q2.1@59.411,41.732 ; Q2.1@59.106,42.037 Q2.1@59.411,41.732 ; C36.1@8.442,27.225 9.254,27.225 C32.1@9.839,26.64 10.317,26.162 v3@10.795,26.162 ; 8.509,10.668 10.541,10.668 12.446,8.763 13.589,8.763 ; v3@10.795,26.162 11.43,26.162 ; 13.589,8.763 17.526,8.763 19.431,10.668 21.463,10.668 21.717,10.414 22.846,10.414 ; 16.51,105.029 22.606,105.029 ; 19.503,85.289 19.503,91.694 ; 19.503,85.289 19.787,85.573 ; 22.606,105.029 23.876,105.029 v2@24.638,104.267 ; 22.846,10.414 23.622,10.414 23.876,10.668 31.496,10.668 32.004,10.16 33.528,10.16 ; 23.749,12.7 28.829,12.7 ; C25.2@24.583,20.317 25.905,20.317 26.543,20.955 27.432,21.844 27.432,24.003 ; v2@24.638,104.267 34.671,104.267 ; 27.432,24.003 27.432,25.146 ; 27.432,25.146 34.798,25.146 ; 28.829,12.7 30.48,12.7 ; 29.819,97.409 33.528,97.409 ; 30.48,12.7 34.163,12.7 34.671,12.192 40.005,12.192 40.513,12.7 ; 30.48,12.7 30.607,12.827 ; 33.274,87.249 40.386,87.249 41.246,86.389 41.246,84.934 ; 33.528,97.409 40.692,97.409 40.819,97.536 ; 34.671,104.267 cw(c34.671,103.296) 35.583,103.629 ccw(c34.671,103.296) 34.671,104.267 ; 34.671,104.267 35.814,104.267 35.941,104.394 ; 34.798,20.317 34.798,24.003 ; 34.798,24.003 34.798,25.146 ; 34.798,25.146 34.798,26.67 35.334,27.206 C38.1@36.885,27.206 37.592,27.206 ; 40.513,12.7 42.418,12.7 ; R93.2@50.499,27.206 C35.1@52.226,27.206 ; C35.1@52.226,27.206 cw(c52.226,26.6) 52.743,26.918 ccw(c52.226,26.6) C35.1@52.226,27.206 ; C35.1@52.226,27.206 52.804,27.206 53.213,26.797 53.213,25.781 ; v3@52.779,26.871 cw(c51.733,25.825) 53.213,25.825 ccw(c51.733,25.825) v3@52.779,26.871 ; 52.857,61.874 BLE.1@53.746,61.874 ; R85.2@53.036,23.673 53.213,23.85 53.213,25.527 ; 53.213,25.527 53.213,25.781 ; v2@13.753,104.611 cw(c14.763,103.601) 14.763,105.029 ccw(c14.763,103.601) v2@13.753,104.611 ; v2@14.112,104.252 cw(c15.989,102.375) 15.989,105.029 ccw(c15.989,102.375) v2@14.112,104.252 ; 35.397,104.267 cw(c35.397,103.561) 36.06,103.802 ccw(c35.397,103.561) 35.397,104.267 ; R85.2@52.897,23.811 ccw(c52.134,24.574) 53.213,24.574 cw(c52.134,24.574) R85.2@52.897,23.811
  Top Layer w0.762: 0.762,12.145 cw(c2.027,12.145) pad.1@1.86,13.399 ; 0.762,13.016 cw(c1.911,13.016) pad.1@1.759,14.155 ; 0.762,13.886 cw(c1.795,13.886) pad.1@1.658,14.91 ; pad.1@1.778,15.113 0.762,14.097 0.762,12.446 0.762,8.509 3.81,5.461 v2(3.81,2.159) ; J12.5@4.404,49.787 ccw(c3.066,51.358) 5.13,51.358 ; v2(4.826,77.83) 4.826,76.2 4.826,74.295 5.588,73.533 11.709,73.533 ; J12.5@5.13,48.935 5.13,51.358 ; J12.5@5.856,49.787 cw(c7.194,51.358) 5.13,51.358 ; v3(7.62,62.23) 10.16,62.23 10.795,61.595 10.795,59.944 11.43,59.309 E6.2@13.208,59.309 ; J12.4@7.93,38.835 8.482,38.835 10.414,40.767 12.192,40.767 12.573,41.148 12.573,42.037 13.208,42.672 13.208,47.625 12.827,48.006 v2(12.7,48.006) ; J12.4@8.069,39.204 ccw(c8.069,41.091) 9.403,39.756 ; 8.179,52.612 cw(c10.126,52.612) E4.2@8.749,53.989 ; E4.2@8.179,54.356 8.179,52.4 8.712,51.867 ; v2@11.25,78.56 cw(c10.142,77.452) E5.2@11.709,77.452 ; E5.2@11.44,74.8 cw(c10.79,74.15) 11.709,74.15 cw(c12.629,74.15) E5.2@11.979,74.8 ; E5.2@11.44,76.99 ccw(c10.79,77.641) 11.709,77.641 ccw(c12.629,77.641) E5.2@11.979,76.99 ; D6.1@11.503,51.508 ccw(c10.635,50.64) 10.635,51.867 ccw(c10.635,53.093) D6.1@11.503,52.226 ; E3.2@11.709,70.18 11.709,72.136 ; 11.709,72.053 ccw(c14.09,72.053) E3.2@12.407,70.369 ; v2@11.709,78.588 E5.2@11.709,75.895 11.709,73.533 ; E3.2@12.04,70.002 12.294,70.002 v2(13.335,68.961) ; E6.2@12.113,59.04 ccw(c11.463,58.389) 11.463,59.309 ccw(c11.463,60.229) E6.2@12.113,59.578 ; D6.1@12.475,51.508 cw(c13.342,50.64) 13.342,51.867 cw(c13.342,53.093) D6.1@12.475,52.226 ; v2@12.52,47.826 cw(c10.86,46.166) 13.208,46.166 ; E6.2@13.764,59.04 cw(c12.347,57.623) 14.351,57.623 ; E6.2@13.849,58.976 cw(c13.376,58.123) 14.351,58.123 ; 13.919,72.161 cw(c13.919,70.548) E7.2@15.059,71.689 ; E6.2@14.303,59.04 cw(c15.567,57.776) 15.567,59.563 ; 14.351,52.622 cw(c15.831,52.622) v2@14.785,53.668 ; 14.351,55.074 ccw(c15.831,55.074) v2@14.785,54.028 ; v2(14.605,53.848) v2@14.351,53.848 ; E7.2@15.418,72.39 15.646,72.161 11.735,72.161 11.709,72.136 ; v2(18.034,59.563) 13.462,59.563 E6.2@13.208,59.309 ; 5.13,51.358 5.639,51.867 8.712,51.867 ; 8.712,51.867 11.786,51.867 D6.1@11.989,51.867 13.767,51.867 14.351,52.451 v2@14.351,53.848 ; 11.709,72.136 11.709,73.533 ; E6.2@13.208,59.309 14.351,58.166 v2@14.351,53.848
  Top Layer w1.016: J12.6@5.13,35.735 7.287,35.735 ; J12.6@6.192,35.165 cw(c7.287,34.398) 7.287,35.735 ; J12.6@6.192,36.304 ccw(c7.287,37.071) 7.287,35.735 ; J12.4@7.93,38.835 7.93,36.378 7.287,35.735
  Bottom Layer w0.254: C68.2@13.204,41.539 14.107,41.539 14.351,41.783 14.351,45.466 15.494,46.609 16.637,46.609 17.907,46.609 18.415,46.101 v1(18.415,43.561) v1@18.415,43.213 ; C68.2@13.432,41.311 cw(c13.984,40.759) 13.984,41.539 cw(c13.984,42.319) C68.2@13.432,41.767 ; v1@18.235,43.741 ccw(c17.802,44.174) 18.415,44.174 ccw(c19.028,44.174) v1@18.595,43.741 ; v3@22.733,58.674 v3(22.86,58.547) 23.214,58.193 R11.1@23.214,58.164 ; v1(25.019,55.245) 26.986,57.212 C84.2@26.986,57.54 C84.2@27.169,57.54 ; v1@25.019,55.499 ccw(c25.019,56.112) 25.453,55.679 ccw(c25.886,55.245) v1@25.273,55.245 ; 26.202,56.428 ccw(c25.09,57.54) C84.2@26.663,57.54 ; C6.1@26.486,50.607 ccw(c25.923,51.435) v2(26.924,51.435) C6.1@26.924,50.597 ; C6.1@26.628,50.397 ccw(c26.249,50.955) v2@26.924,50.955 ; 26.636,56.862 ccw(c25.958,57.54) C84.2@26.917,57.54 ; v2@26.689,50.985 cw(c26.487,50.597) C6.1@26.924,50.597 ; C84.2@26.986,57.217 cw(c26.986,55.994) v3@27.85,56.859 ; C84.2@26.986,57.471 cw(c26.986,56.861) 27.417,57.292 ; v2@27.159,50.985 ccw(c27.361,50.597) C6.1@26.924,50.597 ; C84.2@27.309,57.54 ccw(c27.646,57.54) 27.407,57.302 ; v3@27.432,56.899 ccw(c26.534,56.905) C84.2@27.169,57.54 ; v3@27.81,57.277 cw(c27.804,58.175) C84.2@27.169,57.54 ; v3(27.813,56.896) C84.2@27.169,57.54 ; C7.1@32.058,44.638 cw(c32.058,43.858) 32.609,44.409 cw(c33.161,44.961) C7.1@32.381,44.961 ; C7.1@32.058,44.961 33.203,43.815 35.179,43.815 ; v3@33.17,66.054 cw(c32.983,65.394) C10.1@33.67,65.394 ; v3@33.239,66.299 cw(c33.078,65.73) C10.1@33.67,65.73 ; v3(33.274,66.421) 33.67,66.025 C10.1@33.67,65.473 34.623,64.52 C83.2@36.376,64.52 36.376,63.954 ; v3@33.309,66.543 cw(c33.173,66.065) C10.1@33.67,66.065 ; v3@34.916,44.428 cw(c34.332,43.815) 35.179,43.815 ; v3(35.179,44.704) 35.179,43.815 ; v3@35.442,44.428 ccw(c36.026,43.815) 35.179,43.815 ; C83.2@36.148,64.292 ccw(c35.596,63.74) 35.596,64.52 ccw(c35.596,65.3) C83.2@36.148,64.748 ; 39.624,43.688 cw(c40.285,43.027) v3@40.447,43.948 ; v1@39.624,64.008 cw(c39.011,64.008) 39.444,63.574 cw(c39.878,63.141) v1@39.878,63.754 ; 39.969,44.033 cw(c40.388,43.614) v3@40.491,44.198 ; 40.042,44.106 ccw(c39.825,44.323) v3@40.132,44.323 ; v1@40.098,63.881 cw(c40.662,63.556) C62.1@40.662,64.207 v1@40.077,64.207 ; C62.1@40.223,64.207 ccw(c40.223,63.809) v1(39.878,64.008) ; v1@40.259,59.436 cw(c40.259,58.823) 40.693,59.256 cw(c41.126,59.69) v1@40.513,59.69 ; v1(40.259,59.69) 43.004,56.945 C9.2@43.004,56.765 ; C62.1@40.389,64.035 ccw(c40.077,63.839) v1@40.077,64.207 ; C62.1@40.389,64.379 cw(c40.077,64.576) v1@40.077,64.207 ; v3@40.513,44.577 39.751,43.815 35.179,43.815 ; 41.984,57.965 cw(c40.784,56.765) C9.2@42.481,56.765 ; 42.419,57.53 ccw(c43.004,58.116) C9.2@43.004,57.288 ; 42.418,57.531 cw(c41.651,56.765) C9.2@42.735,56.765 ; U13.2@50.902,66.98 U13.2@51.026,67.104 ; C76.1@53.87,79.48 v1(54.356,78.994) ; C76.1@53.926,79.813 ccw(c54.189,79.621) 53.959,79.391 ; v1@54.102,78.994 ccw(c53.489,78.994) 53.922,79.428 ccw(c54.356,79.861) v1@54.356,79.248 ; C76.1@54.131,79.663 ccw(c54.432,79.444) v1@54.169,79.181 ; C75.1@62.157,72.63 cw(c62.157,71.85) 62.708,72.401 cw(c63.26,72.953) C75.1@62.48,72.953 ; C75.1@62.157,72.953 62.785,72.325 C78.1@62.785,71.402 ; C78.1@62.556,71.631 ccw(c62.005,72.182) 62.785,72.182 ccw(c63.565,72.182) C78.1@63.013,71.631 ; 36.376,63.954 cw(c36.71,63.954) 36.54,64.242 ccw(c36.71,63.954) 36.376,63.954 ; 36.376,63.954 ccw(c36.042,63.954) 36.212,64.242 cw(c36.042,63.954) 36.376,63.954 ; 36.376,63.954 36.83,63.5 39.37,63.5 v1(39.878,64.008) ; v1(39.878,64.008) v1@40.077,64.207
  Bottom Layer w0.406: v3@46.571,23.914 cw(c47.091,23.394) 47.091,24.13 cw(c47.091,24.866) v3@46.571,24.346 ; v3@46.609,24.13 47.752,24.13 48.387,24.765 48.387,25.527 ; v2@48.082,27 cw(c47.345,26.263) 48.387,26.263 cw(c49.429,26.263) v2@48.692,27 ; 48.387,26.035 48.387,25.527 ; v2@48.514,27.432 v2(48.387,27.305) 48.387,25.527